# EAGLE board CT_schematic (EAGLE 7.6.0)

Size 100 x 80 mm. Coordinates in mm from the lower left corner, seen from the top.
Outline: 0,0 100,0 100,80 0,80 0,0
Copper layers (1*16): Top 0.035mm / dielectric 1.5mm / Bottom 0.035mm
Design rules "default": minimum track width 10mil, minimum drill 24mil, track to track 8mil, track to pad 8mil, pad to pad 8mil, via to via 8mil, smd to smd 8mil, copper to edge 40mil, drill to drill 8mil, minimum pad ring 10mil, minimum via ring 8mil, stop-mask expansion 4mil, vias tented up to drill 0mil, thermal gap 10mil

## Footprints (pad centres in the part's own frame; a part is rotated, then mirrored left to right if it is on the bottom)
C0603 = smd 0.8 x 0.8: 1 -0.762,0; 2 0.762,0
C0402 = smd 0.5 x 0.5: 1 -0.508,0; 2 0.508,0
C1206 = smd 1.3 x 1.6: 1 -1.524,0; 2 1.524,0
C0805 = smd 1.2 x 1.3: 1 -1.016,0; 2 1.016,0
2220 = smd 1.85 x 5.5: 1 -2.55,0; 2 2.55,0
C1210 = smd 1.2 x 2.5: 1 -1.524,0; 2 1.524,0
EXV-9H = smd 3.505 x 1.676: 1 -2.857,0; 2 2.857,0
L0603 = smd 0.8 x 0.8: 1 -0.762,0; 2 0.762,0
DR1040 = smd 1.6 x 3.2: 1 -4.458,0; 2 4.458,0
PJ-037B_PACKAGE = drill 3.7 square: 1 12,0 | drill 3.2 square: 2 6,0
R0603 = smd 0.8 x 0.8: 1 -0.762,0; 2 0.762,0
UFBGA100 = smd 0.28 x 0.28: A1 -2.75,2.75; A2 -2.25,2.75; A3 -1.75,2.75; A4 -1.25,2.75; A5 -0.75,2.75; A6 -0.25,2.75; A7 0.25,2.75; A8 0.75,2.75; A9 1.25,2.75; A10 1.75,2.75; A11 2.25,2.75; A12 2.75,2.75; B1 -2.75,2.25; B2 -2.25,2.25; B3 -1.75,2.25; B4 -1.25,2.25; B5 -0.75,2.25; B6 -0.25,2.25; B7 0.25,2.25; B8 0.75,2.25; B9 1.25,2.25; B10 1.75,2.25; B11 2.25,2.25; B12 2.75,2.25; C1 -2.75,1.75; C2 -2.25,1.75; C3 -1.75,1.75; C4 -1.25,1.75; C5 -0.75,1.75; C8 0.75,1.75; C9 1.25,1.75; C10 1.75,1.75; C11 2.25,1.75; C12 2.75,1.75; D1 -2.75,1.25; D2 -2.25,1.25; D3 -1.75,1.25; D10 1.75,1.25; D11 2.25,1.25; D12 2.75,1.25; E1 -2.75,0.75; E2 -2.25,0.75; E3 -1.75,0.75; E10 1.75,0.75; E11 2.25,0.75; E12 2.75,0.75; F1 -2.75,0.25; F2 -2.25,0.25; F11 2.25,0.25; F12 2.75,0.25; G1 -2.75,-0.25; G2 -2.25,-0.25; G11 2.25,-0.25; G12 2.75,-0.25; H1 -2.75,-0.75; H2 -2.25,-0.75; H3 -1.75,-0.75; H10 1.75,-0.75; H11 2.25,-0.75; H12 2.75,-0.75; J1 -2.75,-1.25; J2 -2.25,-1.25; J3 -1.75,-1.25; J10 1.75,-1.25; J11 2.25,-1.25; J12 2.75,-1.25; K1 -2.75,-1.75; K2 -2.25,-1.75; K3 -1.75,-1.75; K4 -1.25,-1.75; K5 -0.75,-1.75; K8 0.75,-1.75; K9 1.25,-1.75; K10 1.75,-1.75; K11 2.25,-1.75; K12 2.75,-1.75; L1 -2.75,-2.25; L2 -2.25,-2.25; L3 -1.75,-2.25; L4 -1.25,-2.25; L5 -0.75,-2.25; L6 -0.25,-2.25; L7 0.25,-2.25; L8 0.75,-2.25; L9 1.25,-2.25; L10 1.75,-2.25; L11 2.25,-2.25; L12 2.75,-2.25; M1 -2.75,-2.75; M2 -2.25,-2.75; M3 -1.75,-2.75; M4 -1.25,-2.75; M5 -0.75,-2.75; M6 -0.25,-2.75; M7 0.25,-2.75; M8 0.75,-2.75; M9 1.25,-2.75; M10 1.75,-2.75; M11 2.25,-2.75; M12 2.75,-2.75
SOT-23-6 = smd 1.1 x 0.6: 1 -1.4,0.95; 2 -1.4,0; 3 -1.4,-0.95; 4 1.4,-0.95; 5 1.4,0; 6 1.4,0.95
AT24C02D = smd 1.6 x 0.6: 1 -2.475,1.905 | smd 1.55 x 0.6: 2 -2.475,0.635; 3 -2.475,-0.635; 4 -2.475,-1.905; 5 2.475,-1.905; 6 2.475,-0.635; 7 2.475,0.635; 8 2.475,1.905
TDFN-8/6MM = smd 0.3 x 0.75: 1 0,0; 2 0.5,0; 3 1,0; 4 1.5,0; 5 1.5,3; 6 1,3; 7 0.5,3; 8 0,3
TFBGA-153 = smd 0.3 x 0.3: A1 -3.25,3.25; A2 -2.75,3.25; A3 -2.25,3.25; A4 -1.75,3.25; A5 -1.25,3.25; A6 -0.75,3.25; A7 -0.25,3.25; A8 0.25,3.25; A9 0.75,3.25; A10 1.25,3.25; A11 1.75,3.25; A12 2.25,3.25; A13 2.75,3.25; A14 3.25,3.25; B1 -3.25,2.75; B2 -2.75,2.75; B3 -2.25,2.75; B4 -1.75,2.75; B5 -1.25,2.75; B6 -0.75,2.75; B7 -0.25,2.75; B8 0.25,2.75; B9 0.75,2.75; B10 1.25,2.75; B11 1.75,2.75; B12 2.25,2.75; B13 2.75,2.75; B14 3.25,2.75; C1 -3.25,2.25; C2 -2.75,2.25; C3 -2.25,2.25; C4 -1.75,2.25; C5 -1.25,2.25; C6 -0.75,2.25; C7 -0.25,2.25; C8 0.25,2.25; C9 0.75,2.25; C10 1.25,2.25; C11 1.75,2.25; C12 2.25,2.25; C13 2.75,2.25; C14 3.25,2.25; D1 -3.25,1.75; D2 -2.75,1.75; D3 -2.25,1.75; D4 -1.75,1.75; D12 2.25,1.75; D13 2.75,1.75; D14 3.25,1.75; E1 -3.25,1.25; E2 -2.75,1.25; E3 -2.25,1.25; E5 -1.25,1.25; E6 -0.75,1.25; E7 -0.25,1.25; E8 0.25,1.25; E9 0.75,1.25; E10 1.25,1.25; E12 2.25,1.25; E13 2.75,1.25; E14 3.25,1.25; F1 -3.25,0.75; F2 -2.75,0.75; F3 -2.25,0.75; F5 -1.25,0.75; F10 1.25,0.75; F12 2.25,0.75; F13 2.75,0.75; F14 3.25,0.75; G1 -3.25,0.25; G2 -2.75,0.25; G3 -2.25,0.25; G5 -1.25,0.25; G10 1.25,0.25; G12 2.25,0.25; G13 2.75,0.25; G14 3.25,0.25; H1 -3.25,-0.25; H2 -2.75,-0.25; H3 -2.25,-0.25; H5 -1.25,-0.25; H10 1.25,-0.25; H12 2.25,-0.25; H13 2.75,-0.25; H14 3.25,-0.25; J1 -3.25,-0.75; J2 -2.75,-0.75; J3 -2.25,-0.75; J5 -1.25,-0.75; J10 1.25,-0.75; J12 2.25,-0.75; J13 2.75,-0.75; J14 3.25,-0.75; K1 -3.25,-1.25; K2 -2.75,-1.25; K3 -2.25,-1.25; K5 -1.25,-1.25; K6 -0.75,-1.25; K7 -0.25,-1.25; K8 0.25,-1.25; K9 0.75,-1.25; K10 1.25,-1.25; K12 2.25,-1.25; K13 2.75,-1.25; K14 3.25,-1.25; L1 -3.25,-1.75; L2 -2.75,-1.75; L3 -2.25,-1.75; L12 2.25,-1.75; L13 2.75,-1.75; L14 3.25,-1.75; M1 -3.25,-2.25; M2 -2.75,-2.25; M3 -2.25,-2.25; M4 -1.75,-2.25; M5 -1.25,-2.25; M6 -0.75,-2.25; M7 -0.25,-2.25; M8 0.25,-2.25; M9 0.75,-2.25; M10 1.25,-2.25; M11 1.75,-2.25; M12 2.25,-2.25; M13 2.75,-2.25; M14 3.25,-2.25; N1 -3.25,-2.75; N2 -2.75,-2.75; N3 -2.25,-2.75; N4 -1.75,-2.75; N5 -1.25,-2.75; N6 -0.75,-2.75; N7 -0.25,-2.75; N8 0.25,-2.75; N9 0.75,-2.75; N10 1.25,-2.75; N11 1.75,-2.75; N12 2.25,-2.75; N13 2.75,-2.75; N14 3.25,-2.75; P1 -3.25,-3.25; P2 -2.75,-3.25; P3 -2.25,-3.25; P4 -1.75,-3.25; P5 -1.25,-3.25; P6 -0.75,-3.25; P7 -0.25,-3.25; P8 0.25,-3.25; P9 0.75,-3.25; P10 1.25,-3.25; P11 1.75,-3.25; P12 2.25,-3.25; P13 2.75,-3.25; P14 3.25,-3.25
QFN-32 = smd 0.6 x 0.3: 1 -2.3,1.75; 2 -2.3,1.25; 3 -2.3,0.75; 4 -2.3,0.25; 5 -2.3,-0.25; 6 -2.3,-0.75; 7 -2.3,-1.25; 8 -2.3,-1.75; 17 2.3,-1.75; 18 2.3,-1.25; 19 2.3,-0.75; 20 2.3,-0.25; 21 2.3,0.25; 22 2.3,0.75; 23 2.3,1.25; 24 2.3,1.75 | smd 0.3 x 0.6: 9 -1.75,-2.3; 10 -1.25,-2.3; 11 -0.75,-2.3; 12 -0.25,-2.3; 13 0.25,-2.3; 14 0.75,-2.3; 15 1.25,-2.3; 16 1.75,-2.3; 25 1.75,2.3; 26 1.25,2.3; 27 0.75,2.3; 28 0.25,2.3; 29 -0.25,2.3; 30 -0.75,2.3; 31 -1.25,2.3; 32 -1.75,2.3 | smd 3.2 x 3.2: EXP 0,0
SJ-43515TS-SMT-TR = smd 2.2 x 3: 1 0.6,-7.4; 4 3.4,-7.4 | smd 3 x 3: 2 12.8,-7.4; 5 17,-3 | smd 2 x 3: 3 5.3,0; 6 2.5,0 | drill 1.8: P$7 4.5,-3.69; P$8 11.54,-3.69
WM-64PC = drill 0.6 pad 1: 1 -1,0.95; 2 -1,-0.95
USB-A-H = drill 0.914: 1 2.718,3.493; 2 2.718,1.003; 3 2.718,-1.003; 4 2.718,-3.493 | drill 2.311: 5 0,-6.566; 6 0,6.566
SOT143B = smd 1 x 0.7: 1 -0.75,-1 | smd 0.6 x 0.7: 2 0.95,-1; 3 0.95,1; 4 -0.95,1
ABLS-25.000MHZ-B2F-T = smd 5.6 x 2.8: 1 -3.81,0; 2 5.69,0
ASEK = smd 1.4 x 1: 1 -1.1,-0.8; 2 1.1,-0.8; 3 1.1,0.8; 4 -1.1,0.8
ASFL1 = smd 1.7 x 1.5: 1 -1.27,-1.1; 2 1.27,-1.1; 3 1.27,1.1; 4 -1.27,1.1
WSON-8 = smd 0.3 x 0.6: 1 -0.75,0; 2 0.05,0; 3 0.85,0; 4 1.65,0; 5 1.65,3.8; 6 0.85,3.8; 7 0.05,3.8; 8 -0.75,3.8 | smd 3 x 2.6: PAD 0.45,1.9
QFN-16_EP = smd 0.805 x 0.3: 1 -1.452,0.75; 2 -1.452,0.25; 3 -1.452,-0.25; 4 -1.452,-0.75; 9 1.452,-0.75; 10 1.452,-0.25; 11 1.452,0.25; 12 1.452,0.75 | smd 0.3 x 0.805: 5 -0.75,-1.452; 6 -0.25,-1.452; 7 0.25,-1.452; 8 0.75,-1.452; 13 0.75,1.452; 14 0.25,1.452; 15 -0.25,1.452; 16 -0.75,1.452 | smd 1.55 x 1.55: 17 0,0
SON-6 = smd 0.55 x 0.3: 1 -0.355,0.5 | smd 0.52 x 0.3: 2 -0.37,0; 3 -0.37,-0.5; 4 0.37,-0.5; 5 0.37,0; 6 0.37,0.5
SW_4-1437565-2 = smd 1.4 x 2.1: 1 -2.23,4.55; 2 -2.23,-4.55; 3 2.23,4.55; 4 2.23,-4.55
LGM67K-G1J2-24-Z = smd 0.8 x 1.4: A -2,0; C 0,0
NC7SZ125M5X = smd 1.3 x 0.7: 1 -1.3,0.95; 2 -1.3,0; 3 -1.3,-0.95; 4 1.3,-0.95; 5 1.3,0.95

## Placement (x,y rotation side)
C1  1e-06  [C0603]  -57.15,83.82 0 top  (outside the outline)
C2  1e-07  [C0603]  -60.96,83.82 0 top  (outside the outline)
C3  1e-07  [C0603]  -64.77,83.82 0 top  (outside the outline)
C4  1e-07  [C0603]  -68.58,83.82 0 top  (outside the outline)
C5  1e-07  [C0603]  -72.39,83.82 0 top  (outside the outline)
C6  1e-07  [C0603]  -76.2,83.82 0 top  (outside the outline)
C7  1e-07  [C0603]  -80.01,83.82 0 top  (outside the outline)
C8  4.7e-06  [C0603]  -34.29,83.82 0 top  (outside the outline)
C9  1e-08  [C0603]  -83.82,83.82 0 top  (outside the outline)
C10  1e-06  [C0603]  -87.63,83.82 0 top  (outside the outline)
C11  2.2e-06  [C0603]  -38.1,83.82 0 top  (outside the outline)
C12  2.2e-06  [C0603]  -41.91,83.82 0 top  (outside the outline)
C13  1e-11  [C0402]  -41.91,93.98 0 top  (outside the outline)
C14  1e-11  [C0402]  -45.72,93.98 0 top  (outside the outline)
C15  1e-08  [C0402]  -49.53,93.98 0 top  (outside the outline)
C16  1e-08  [C0402]  -53.34,93.98 0 top  (outside the outline)
C17  1e-07  [C0402]  -57.15,93.98 0 top  (outside the outline)
C18  2.2e-06  [C0603]  -45.72,83.82 0 top  (outside the outline)
C19  2.2e-06  [C0603]  -49.53,83.82 0 top  (outside the outline)
C20  1e-07  [C0402]  -60.96,93.98 0 top  (outside the outline)
C21  1e-07  [C0402]  -64.77,93.98 0 top  (outside the outline)
C22  2.2e-06  [C0603]  -53.34,83.82 0 top  (outside the outline)
C23  1e-06  [C0603]  -15.24,88.9 0 top  (outside the outline)
C24  1e-06  [C0603]  -19.05,88.9 0 top  (outside the outline)
C25  1e-06  [C0603]  -22.86,88.9 0 top  (outside the outline)
C26  1e-06  [C0603]  -26.67,88.9 0 top  (outside the outline)
C27  1e-06  [C0603]  -30.48,88.9 0 top  (outside the outline)
C28  1e-06  [C0603]  -34.29,88.9 0 top  (outside the outline)
C29  1e-06  [C0603]  -38.1,88.9 0 top  (outside the outline)
C30  1e-07  [C0402]  -68.58,93.98 0 top  (outside the outline)
C31  1e-07  [C0402]  -72.39,93.98 0 top  (outside the outline)
C32  1e-07  [C0402]  -76.2,93.98 0 top  (outside the outline)
C33  1e-07  [C0402]  -80.01,93.98 0 top  (outside the outline)
C34  1e-06  [C0603]  -41.91,88.9 0 top  (outside the outline)
C35  1e-08  [C0402]  -83.82,93.98 0 top  (outside the outline)
C36  1e-08  [C0402]  -87.63,93.98 0 top  (outside the outline)
C37  1e-08  [C0402]  -91.44,93.98 0 top  (outside the outline)
C38  1e-05  [C1206]  -66.04,66.04 0 top  (outside the outline)
C39  1e-05  [C0805]  -15.24,73.66 0 top  (outside the outline)
C40  1e-05  [C0805]  -20.32,73.66 0 top  (outside the outline)
C41  1e-06  [C0603]  -45.72,88.9 0 top  (outside the outline)
C42  1e-07  [C0402]  -15.24,99.06 0 top  (outside the outline)
C43  6.8e-05  [2220]  -49.53,49.53 0 top  (outside the outline)
C44  1e-08  [C0402]  -19.05,99.06 0 top  (outside the outline)
C45  1e-05  [C1206]  -72.39,66.04 0 top  (outside the outline)
C46  1e-05  [C1210]  -59.69,67.31 0 top  (outside the outline)
C47  1e-07  [C0402]  -22.86,99.06 0 top  (outside the outline)
C48  0.0001  [EXV-9H]  -77.47,58.42 0 top  (outside the outline)
C49  0.0001  [EXV-9H]  -17.78,67.31 0 top  (outside the outline)
C50  1e-08  [C0402]  -26.67,99.06 0 top  (outside the outline)
C51  1e-08  [C0402]  -30.48,99.06 0 top  (outside the outline)
F1  240.0  [L0603]  -49.53,88.9 0 top  (outside the outline)
I1  3.8e-06  [DR1040]  -53.34,38.1 0 top  (outside the outline)
J1  PJ-037B  [PJ-037B_PACKAGE]  -83.82,25.4 0 top  (outside the outline)
R2  1000.0  [R0603]  -53.34,88.9 0 top  (outside the outline)
R7  4700.0  [R0603]  -57.15,88.9 0 top  (outside the outline)
R8  4700.0  [R0603]  -60.96,88.9 0 top  (outside the outline)
R9  2200.0  [R0603]  -64.77,88.9 0 top  (outside the outline)
R11  2200.0  [R0603]  -68.58,88.9 0 top  (outside the outline)
R13  2200.0  [R0603]  -72.39,88.9 0 top  (outside the outline)
R15  2200.0  [R0603]  -76.2,88.9 0 top  (outside the outline)
R17  47000.0  [R0603]  -50.8,73.66 0 top  (outside the outline)
R18  10000.0  [R0603]  -55.88,73.66 0 top  (outside the outline)
R19  10000.0  [R0603]  -60.96,73.66 0 top  (outside the outline)
R20  10000.0  [R0603]  -66.04,73.66 0 top  (outside the outline)
R21  1270.0  [R0603]  -80.01,88.9 0 top  (outside the outline)
R22  10000.0  [R0603]  -71.12,73.66 0 top  (outside the outline)
R23  10000.0  [R0603]  -76.2,73.66 0 top  (outside the outline)
R24  10000.0  [R0603]  -81.28,73.66 0 top  (outside the outline)
R25  10000.0  [R0603]  -86.36,73.66 0 top  (outside the outline)
R26  10000.0  [R0603]  -15.24,78.74 0 top  (outside the outline)
R27  10000.0  [R0603]  -20.32,78.74 0 top  (outside the outline)
R28  10000.0  [R0603]  -25.4,78.74 0 top  (outside the outline)
R29  10000.0  [R0603]  -30.48,78.74 0 top  (outside the outline)
R30  10000.0  [R0603]  -35.56,78.74 0 top  (outside the outline)
R31  34000.0  [R0603]  -40.64,78.74 0 top  (outside the outline)
R32  34000.0  [R0603]  -45.72,78.74 0 top  (outside the outline)
R33  34000.0  [R0603]  -50.8,78.74 0 top  (outside the outline)
R34  34000.0  [R0603]  -55.88,78.74 0 top  (outside the outline)
R35  34000.0  [R0603]  -60.96,78.74 0 top  (outside the outline)
R36  34000.0  [R0603]  -66.04,78.74 0 top  (outside the outline)
R37  34000.0  [R0603]  -71.12,78.74 0 top  (outside the outline)
R38  34000.0  [R0603]  -76.2,78.74 0 top  (outside the outline)
R39  34000.0  [R0603]  -81.28,78.74 0 top  (outside the outline)
R40  34000.0  [R0603]  -86.36,78.74 0 top  (outside the outline)
R41  1270.0  [R0603]  -83.82,88.9 0 top  (outside the outline)
R42  1270.0  [R0603]  -87.63,88.9 0 top  (outside the outline)
R43  100000.0  [R0603]  -25.4,73.66 0 top  (outside the outline)
R44  200.0  [R0603]  -15.24,93.98 0 top  (outside the outline)
R45  1000.0  [R0603]  -19.05,93.98 0 top  (outside the outline)
R46  20000.0  [R0603]  -15.24,83.82 0 top  (outside the outline)
R47  91000.0  [R0603]  -20.32,83.82 0 top  (outside the outline)
R48  300000.0  [R0603]  -30.48,73.66 0 top  (outside the outline)
R49  100000.0  [R0603]  -35.56,73.66 0 top  (outside the outline)
R50  3900.0  [R0603]  -22.86,93.98 0 top  (outside the outline)
R51  1000.0  [R0603]  -26.67,93.98 0 top  (outside the outline)
R52  10000.0  [R0603]  -25.4,83.82 0 top  (outside the outline)
R53  10000.0  [R0603]  -30.48,83.82 0 top  (outside the outline)
R54  9100.0  [R0603]  -30.48,93.98 0 top  (outside the outline)
R55  680000.0  [R0603]  -40.64,73.66 0 top  (outside the outline)
R56  120000.0  [R0603]  -45.72,73.66 0 top  (outside the outline)
U1  stm32f401VCH7  [UFBGA100]  -43.18,38.1 0 top  (outside the outline)
U2  MAX4995AAUT+T  [SOT-23-6]  -77.47,66.04 0 top  (outside the outline)
U3  AT24C02D-SSHM-T  [AT24C02D]  -40.64,49.53 0 top  (outside the outline)
U4  24AA32AT-I/MNY  [TDFN-8/6MM]  -25.4,48.26 0 top  (outside the outline)
U5  mtfc4gmcdm  [TFBGA-153]  -20.32,8.89 0 top  (outside the outline)
U6  SGTL5000XNAA3  [QFN-32]  -80.01,38.1 0 top  (outside the outline)
U7  SJ-43515TS-SMT-TR  [SJ-43515TS-SMT-TR]  -71.12,10.16 0 top  (outside the outline)
U8  SJ-43515TS-SMT-TR  [SJ-43515TS-SMT-TR]  -39.37,26.67 0 top  (outside the outline)
U9  SJ-43515TS-SMT-TR  [SJ-43515TS-SMT-TR]  -67.31,26.67 0 top  (outside the outline)
U10  WM-64PCT  [WM-64PC]  -66.04,38.1 0 top  (outside the outline)
U11  61400416021  [USB-A-H]  -34.29,8.89 0 top  (outside the outline)
U12  prtr5v0u2ax  [SOT143B]  -43.18,99.06 0 top  (outside the outline)
U13  ABLS-25.000MHZ-B2F-T  [ABLS-25.000MHZ-B2F-T]  -36.83,67.31 0 top  (outside the outline)
U14  ASEK-32.768KHz-ECST  [ASEK]  -68.58,58.42 0 top  (outside the outline)
U15  ASFL-24.57MHZ-NCS  [ASFL1]  -48.26,58.42 0 top  (outside the outline)
U16  LP3878SDX-ADJ/NOPB  [WSON-8]  -71.12,46.99 0 top  (outside the outline)
U17  LTC3601EUD#PBF  [QFN-16_EP]  -35.56,93.98 0 top  (outside the outline)
U18  LP3878SDX-ADJ/NOPB  [WSON-8]  -30.48,57.15 0 top  (outside the outline)
U19  TPS3895ADRYR  [SON-6]  -46.99,97.79 0 top  (outside the outline)
U20  4-1437565-2  [SW_4-1437565-2]  -27.94,38.1 0 top  (outside the outline)
U21  Q65110A2395  [LGM67K-G1J2-24-Z]  -48.26,67.31 0 top  (outside the outline)
U22  nc7sz125m5x  [NC7SZ125M5X]  -82.55,66.04 0 top  (outside the outline)
U23  nc7sz125m5x  [NC7SZ125M5X]  -88.9,66.04 0 top  (outside the outline)

## Library data of the parts
C1-C51 F1 I1 J1 R2 R7-R9 R11 R13 R15 R17-R56 U1-U23 = circuit_tree

## Nets
CLK_CRYSTAL_U1_F1: C13.1 U1.F1 U13.1
CLK_CRYSTAL_U1_G1: C14.1 U1.G1 U13.2
CLK_U1_D1: U1.D1 U14.3
CLK_U6_21: U6.21 U15.3
GND: C1.2 C2.2 C3.2 C4.2 C5.2 C6.2 C7.2 C8.2 C9.2 C10.2 C11.2 C12.2 C13.2 C14.2 C15.2 C16.2 C17.2 C18.2 C19.2 C20.2 C21.2 C22.2 C30.2 C31.2 C32.2 C33.2 C34.2 C35.2 C36.2 C37.2 C38.2 C39.2 C40.2 C41.2 C43.1 C43.2 C44.2 C45.2 C46.2 C47.2 C48.2 C49.2 C50.2 C51.2 J1.2 R2.2 R17.2 R18.2 R20.2 R21.2 R23.2 R24.2 R26.2 R27.2 R28.2 R30.2 R42.2 R45.2 R46.2 R48.2 R51.2 R54.2 R56.2 U1.D3 U1.F2 U1.F11 U1.F12 U1.J1 U1.K1 U2.2 U3.4 U4.4 U5.C4 U5.E7 U5.G5 U5.H10 U5.K8 U5.N2 U5.N5 U5.P4 U5.P6 U6.1 U6.3 U6.7 U6.EXP U8.1 U9.1 U10.2 U11.4 U11.5 U11.6 U12.1 U14.2 U15.2 U16.3 U16.PAD U17.1 U17.9 U17.17 U18.3 U18.PAD U19.2 U21.C U22.1 U22.3 U23.1 U23.3
NET_U1_A4: R18.1 U1.A4
NET_U1_A8: R15.1 U1.A8 U4.5
NET_U1_B4: R11.1 U1.B4 U3.5
NET_U1_B5: R9.1 U1.B5 U3.6
NET_U1_C11: C12.1 U1.C11
NET_U1_C12: R21.1 U1.C12
NET_U1_E3: R20.1 U1.E3
NET_U1_H2: R8.1 U1.H2 U23.4
NET_U1_H3: R19.1 U1.H3
NET_U1_L10: R13.1 U1.L10 U4.6
NET_U1_L11: C11.1 U1.L11
NET_U1_M1: C9.1 C10.1 F1.1 U1.L1 U1.M1
NET_U1_M11: U21.A
NET_U1_M12: U20.3 U20.4
NET_U2_3: R17.1 U2.3
NET_U3_1: R25.1 U3.1
NET_U3_2: R26.1 U3.2
NET_U3_3: R27.1 U3.3
NET_U3_7: R24.1 U3.7
NET_U4_1: R28.1 U4.1
NET_U4_2: R29.1 U4.2
NET_U4_3: R30.1 U4.3
NET_U5_C2: C19.1 C20.1 U5.C2
NET_U5_K5: R7.1 U5.K5 U22.4
NET_U6_10: C33.1 U6.10
NET_U6_29: R41.1 U6.29
NET_U6_31: R42.1 U6.31
NET_U7_1: U6.4 U7.1
NET_U7_2: U6.2 U7.2
NET_U7_5: U6.6 U7.5
NET_U8_2: C24.1 U8.2
NET_U8_5: C23.1 U8.5
NET_U8_11: C24.2
NET_U8_12: C23.2
NET_U9_2: C26.1 C27.1 U9.2
NET_U9_5: C25.1 U9.5
NET_U9_13: C26.2 C27.2
NET_U9_14: C25.2
NET_U10_1: C28.1 C29.1 C34.1 U6.16 U10.1
NET_U10_15: C28.2 C29.2
NET_U16_1: C37.1 U16.1
NET_U16_6: R44.2 R45.1 U16.6
NET_U16_8: R43.1 U16.8
NET_U17_3: C42.2 I1.1 U17.3 U17.4
NET_U17_6: C42.1 U17.6
NET_U17_7: C41.1 U17.7 U17.12
NET_U17_10: R48.1 U17.10
NET_U17_11: R46.1 R47.1 U17.11
NET_U17_14: U17.14
NET_U17_ATNET_3: I1.2 R47.2
NET_U18_1: C44.1 U18.1
NET_U18_6: R50.2 R51.1 U18.6
NET_U18_8: R49.1 U18.8
NET_U19_1: R53.1 R54.1 U19.1
NET_U19_3: R55.2 R56.1 U19.3
NET_U19_4: R52.1 U19.4 U22.2 U23.2
NET_U20_1: R2.1 U20.1 U20.2
PROC_GPIO_TO_U1_USB_FAULT: R22.1 U1.A2 U2.6
PROC_GPIO_TO_U1_VBUS_EN: R23.1 U1.A1 U2.4
PROC_I2S2_CK: U1.B8 U6.24
PROC_I2S2_EXT_SD: U1.J3 U6.25
PROC_I2S2_SD: U1.K2 U6.26
PROC_I2S2_WS: U1.L12 U6.23
PROC_SDIO_CK: R40.1 U1.B10 U5.M6
PROC_SDIO_CMD: R39.1 U1.C8 U5.M5
PROC_SDIO_D0: R31.1 U1.E10 U5.A3
PROC_SDIO_D1: R32.1 U1.D12 U5.A4
PROC_SDIO_D2: R33.1 U1.B11 U5.A5
PROC_SDIO_D3: R34.1 U1.C10 U5.B2
PROC_SDIO_D4: R35.1 U1.A3 U5.B3
PROC_SDIO_D5: R36.1 U1.B3 U5.B4
PROC_SDIO_D6: R37.1 U1.E12 U5.B5
PROC_SDIO_D7: R38.1 U1.E11 U5.B6
PROC_USB_OTG_FS_DM: U1.B12 U11.2 U12.3
PROC_USB_OTG_FS_DP: U1.A12 U11.3 U12.2
PROC_USB_OTG_FS_VBUS: U1.D10 U2.1 U11.1 U12.4
VCC_S1_7V8: C38.1 C40.1 C45.1 C48.1 C49.1 J1.1 R43.2 R49.2 U16.4 U17.15 U17.16 U18.4
VCC_TIER1_1V2: C30.1 C39.1 R44.1 U6.30 U16.5
VCC_TIER1_3V3: C1.1 C2.1 C3.1 C4.1 C5.1 C6.1 C7.1 C8.1 C15.1 C16.1 C17.1 C18.1 C21.1 C22.1 C31.1 C32.1 C35.1 C36.1 C43.2 C47.1 C50.1 C51.1 F1.2 I1.2 R7.2 R8.2 R9.2 R11.2 R13.2 R15.2 R19.2 R22.2 R25.2 R29.2 R31.2 R32.2 R33.2 R34.2 R35.2 R36.2 R37.2 R38.2 R39.2 R40.2 R41.2 R47.2 R52.2 R53.2 R55.1 U1.C4 U1.E2 U1.G2 U1.G11 U1.G12 U3.8 U4.7 U4.8 U5.C6 U5.E6 U5.F5 U5.J10 U5.K9 U5.M4 U5.N4 U5.P3 U5.P5 U6.5 U6.20 U14.4 U15.4 U17.8 U19.6 U22.5 U23.5
VCC_TIER1_5V0: C46.1 R50.1 U2.5 U18.5

## Tracks (layer width: path | path; a pad name or v marks a point on that pad's centre or on a via)
CLK_CRYSTAL_U1_F1  (2 unrouted)
CLK_CRYSTAL_U1_G1  (2 unrouted)
CLK_U1_D1  (1 unrouted)
CLK_U6_21  (1 unrouted)
GND  (106 unrouted)
NET_U1_A4  (1 unrouted)
NET_U1_A8  (2 unrouted)
NET_U1_B4  (2 unrouted)
NET_U1_B5  (2 unrouted)
NET_U1_C11  (1 unrouted)
NET_U1_C12  (1 unrouted)
NET_U1_E3  (1 unrouted)
NET_U1_H2  (2 unrouted)
NET_U1_H3  (1 unrouted)
NET_U1_L10  (2 unrouted)
NET_U1_L11  (1 unrouted)
NET_U1_M1  (4 unrouted)
NET_U1_M12  (1 unrouted)
NET_U2_3  (1 unrouted)
NET_U3_1  (1 unrouted)
NET_U3_2  (1 unrouted)
NET_U3_3  (1 unrouted)
NET_U3_7  (1 unrouted)
NET_U4_1  (1 unrouted)
NET_U4_2  (1 unrouted)
NET_U4_3  (1 unrouted)
NET_U5_C2  (2 unrouted)
NET_U5_K5  (2 unrouted)
NET_U6_10  (1 unrouted)
NET_U6_29  (1 unrouted)
NET_U6_31  (1 unrouted)
NET_U7_1  (1 unrouted)
NET_U7_2  (1 unrouted)
NET_U7_5  (1 unrouted)
NET_U8_2  (1 unrouted)
NET_U8_5  (1 unrouted)
NET_U9_2  (2 unrouted)
NET_U9_5  (1 unrouted)
NET_U9_13  (1 unrouted)
NET_U10_1  (4 unrouted)
NET_U10_15  (1 unrouted)
NET_U16_1  (1 unrouted)
NET_U16_6  (2 unrouted)
NET_U16_8  (1 unrouted)
NET_U17_3  (3 unrouted)
NET_U17_6  (1 unrouted)
NET_U17_7  (2 unrouted)
NET_U17_10  (1 unrouted)
NET_U17_11  (2 unrouted)
NET_U17_ATNET_3  (1 unrouted)
NET_U18_1  (1 unrouted)
NET_U18_6  (2 unrouted)
NET_U18_8  (1 unrouted)
NET_U19_1  (2 unrouted)
NET_U19_3  (2 unrouted)
NET_U19_4  (3 unrouted)
NET_U20_1  (2 unrouted)
PROC_GPIO_TO_U1_USB_FAULT  (2 unrouted)
PROC_GPIO_TO_U1_VBUS_EN  (2 unrouted)
PROC_I2S2_CK  (1 unrouted)
PROC_I2S2_EXT_SD  (1 unrouted)
PROC_I2S2_SD  (1 unrouted)
PROC_I2S2_WS  (1 unrouted)
PROC_SDIO_CK  (2 unrouted)
PROC_SDIO_CMD  (2 unrouted)
PROC_SDIO_D0  (2 unrouted)
PROC_SDIO_D1  (2 unrouted)
PROC_SDIO_D2  (2 unrouted)
PROC_SDIO_D3  (2 unrouted)
PROC_SDIO_D4  (2 unrouted)
PROC_SDIO_D5  (2 unrouted)
PROC_SDIO_D6  (2 unrouted)
PROC_SDIO_D7  (2 unrouted)
PROC_USB_OTG_FS_DM  (2 unrouted)
PROC_USB_OTG_FS_DP  (2 unrouted)
PROC_USB_OTG_FS_VBUS  (3 unrouted)
VCC_S1_7V8  (11 unrouted)
VCC_TIER1_1V2  (4 unrouted)
VCC_TIER1_3V3  (73 unrouted)
VCC_TIER1_5V0  (3 unrouted)